# Altium PCB 单相本地卡表_SX-MC6017A-200606.PcbDoc (part 2 of 2)
Units mm, origin at the board's own origin, x right, y up, seen from the top; angles counter-clockwise.
Board outline 98.55 x 94.74 mm, 2 copper layers (Top Layer, Bottom Layer); 169 components, 155 nets, 535 pads, 382 vias.
Unrouted connection lines stored in the file: 1.
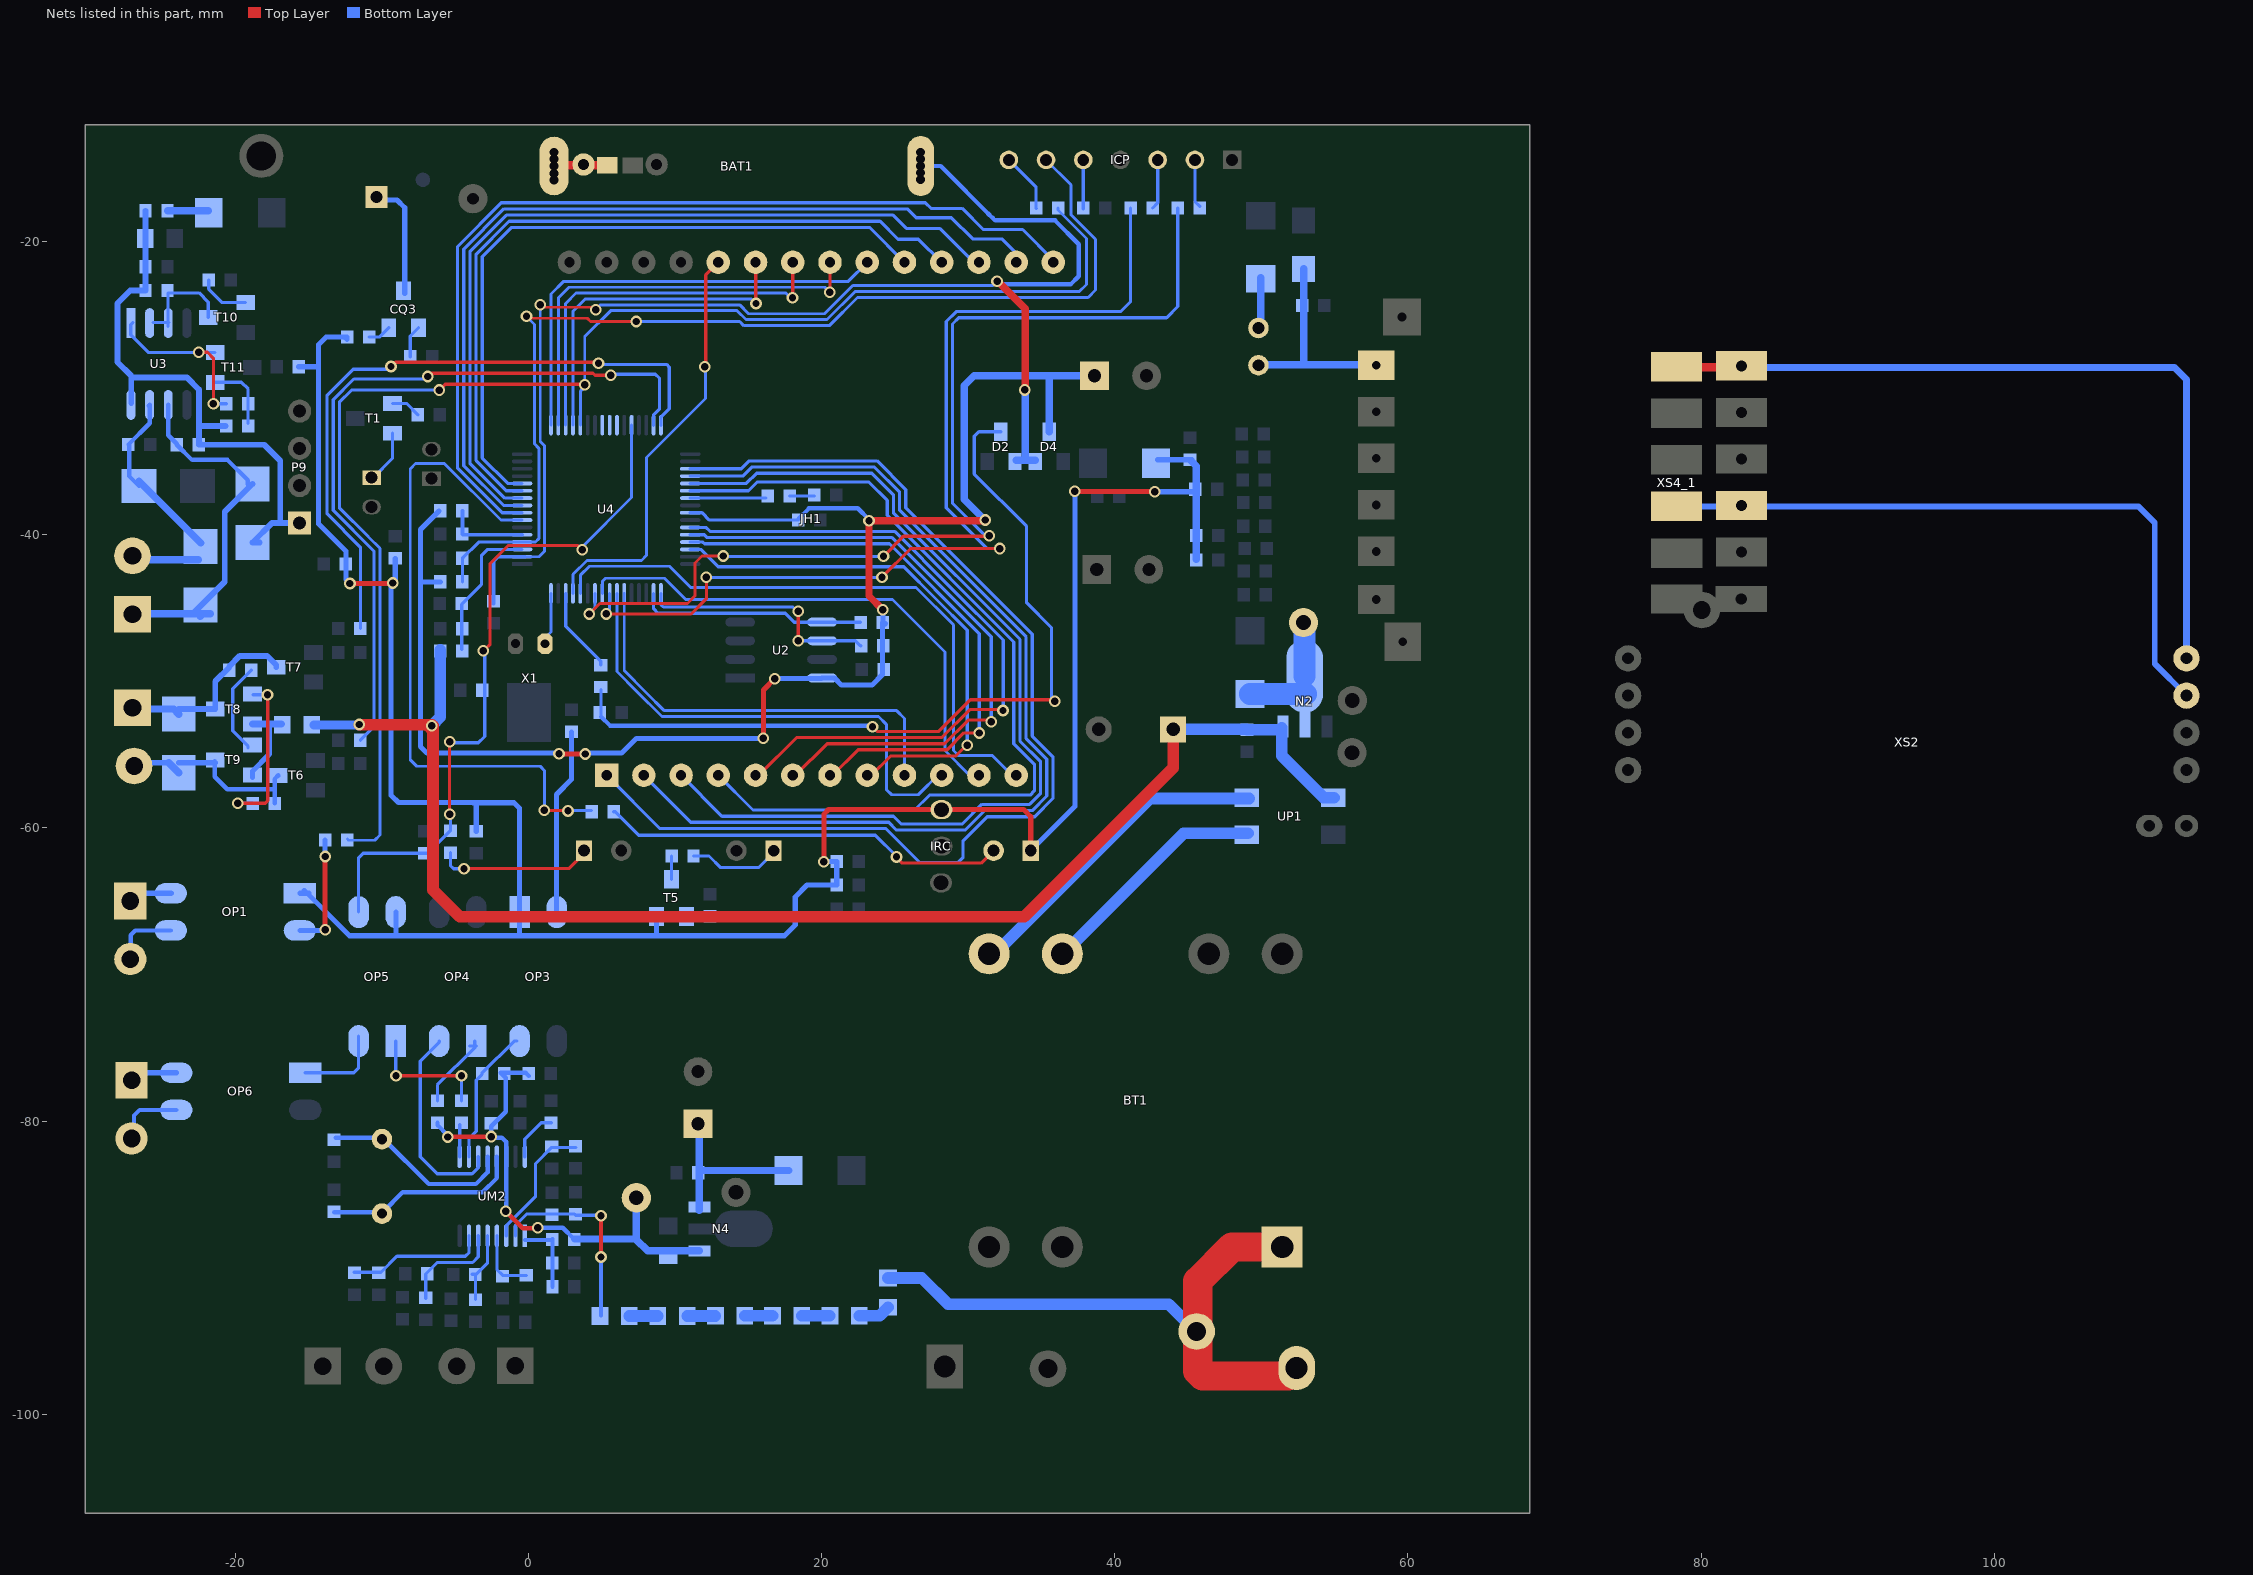
[diagram p2: the nets of this part, all layers, seen from the top]

## Via types
v1: diameter 0.8, hole 0.5, Top Layer to Bottom Layer, 380 vias
v2: diameter 0.8, hole 0.5, Top Layer to Bottom Layer, tented both sides, 2 vias

## Nets (pads, with @x,y where several pads share a name; then routed paths per layer and width w, separated by ;. In a path a pad name is that pad's centre, name@x,y a point inside that pad or via, vN(x,y) a via of type N, cw(c..) or ccw(c..) an arc to the next point about the centre after c; other vN are vias at no path point) (continued)
LVDIN: C13.1 R31.1 R32.2 U4.3 | length 9.9
  Bottom Layer w0.22: R31.1@-4.566,-47.814 -4.566,-44.747 -3.216,-43.398 -3.216,-41.428 -2.784,-40.996 U4.3@-0.445,-40.996
MISO: U4.25
MOSI: U4.24
N: BT1.1 JR10.2 MOV.1 N.1 | length 42.1
  Top Layer w2: BT1.1@51.419,-88.592 47.993,-88.592 45.654,-90.932 45.654,-97.054 46,-97.399 51.85,-97.399 N.1@52.072,-97.177
  Bottom Layer w0.8: JR10.2@24.523,-90.708 26.833,-90.708 28.621,-92.496 43.685,-92.496 45.598,-94.409 MOV.1@45.598,-94.429
Net485A_1: RA.1 REAY1.2@-27.023,-45.429 TVS1.2 TVS3.1 U3.6 | length 24.3
  Bottom Layer w0.3: U3.6@-24.584,-31.138 -24.584,-33.207 RA.1@-23.998,-33.793 ; RA.1@-23.998,-33.854 -22.96,-34.892 -20.541,-34.892 -19.167,-36.266 TVS3.1@-19.167,-36.544
  Bottom Layer w0.4: TVS1.2@-22.908,-45.378 -20.732,-43.203 -20.732,-38.422 TVS3.1@-18.833,-36.523
  Bottom Layer w0.5: REAY1.2@-26.221,-45.378 TVS1.2@-21.717,-45.378 ; TVS1.2@-22.395,-45.556 TVS1.2@-22.217,-45.378
Net485B_1: RB.2 REAY1.1@-27.023,-41.435 TVS1.1 TVS4.2 U3.7 | length 16.4
  Bottom Layer w0.3: RB.2@-27.299,-33.84 -25.854,-32.395 U3.7@-25.854,-31.138 U3.7@-25.908,-31.192 ; RB.2@-27.257,-33.84 -27.257,-35.989 TVS4.2@-26.579,-36.667
  Bottom Layer w0.5: TVS4.2@-26.579,-36.329 TVS4.2@-26.441,-36.467 ; TVS4.2@-26.41,-36.498 TVS4.2@-26.441,-36.467 ; REAY1.1@-26.393,-41.694 TVS1.1@-22.533,-41.694 ; TVS1.1@-22.366,-40.564 -26.441,-36.489 TVS4.2@-26.441,-36.467
NetBAT1_2: BAT1.2 KB.1 pad.1@3.752,-14.734 | length 3.6
  Top Layer w0.6: BAT1.2@1.781,-14.793 KB.1@5.361,-14.793
NetBT1_4: BT1.4 UP1.2 | length 22.3
  Bottom Layer w0.8: BT1.4@31.304,-68.756 31.638,-68.756 42.405,-57.99 UP1.2@49.175,-57.99
NetBT1_5: BT1.5 UP1.1 | length 16.2
  Bottom Layer w0.8: BT1.5@36.304,-68.756 44.691,-60.369 UP1.1@49.08,-60.369
NetC10_2: C10.2 R18.2 | length 1.7
  Bottom Layer w0.22: R18.2@17.82,-37.354 C10.2@19.497,-37.354
NetCQ3_B: CQ3.B R25.2 | length 2.2
  Bottom Layer w0.22: R25.2@-8.069,-27.854 -8.069,-26.437 CQ3.B@-7.511,-25.879
NetCQ3_E: CQ3.E R26.1 | length 1.6
  Bottom Layer w0.22: R26.1@-10.879,-26.497 -10.161,-26.497 CQ3.E@-9.543,-25.879
NetD1_K: D1.K DC3.1 DC4.1 N4.3 | length 12
  Bottom Layer w0.5: N4.3@11.634,-86.105 DC4.1@11.634,-80.156 ; DC3.1@11.691,-83.373 D1.K@17.741,-83.373
NetD6_K: D6.K F1.2 | length 3.9
  Bottom Layer w0.5: F1.2@49.959,-26.304 D6.K@49.959,-22.448
NetD8_A: D8.A N2.2 pad.0@52.871,-45.986 | length 7.5
  Bottom Layer w1.5: D8.A@49.221,-50.851 N2.2@53.044,-50.851 ; pad.0@52.871,-45.986 52.949,-46.063 N2.2@52.949,-49.648
NetD12_K: D12.K R63.2 | length 2.8
  Bottom Layer w0.5: R63.2@-24.636,-17.894 D12.K@-21.857,-17.894
NetDR8_2: DR8.2 T8.B | length 11.3
  Top Layer w0.22: v1@-19.812,-58.322 -17.965,-58.322 -17.788,-58.145 v1@-17.788,-50.945
  Bottom Layer w0.22: v1(-19.84,-58.322) -18.837,-58.322 DR8.2@-18.83,-58.329 ; T8.B@-18.793,-50.915 v1(-17.808,-50.915)
NetDR9_2: DR9.2 T9.B | length 6.2
  Bottom Layer w0.22: T9.B@-19.146,-54.533 -19.146,-54.402 -20.181,-53.368 -20.181,-50.502 DR9.2@-18.925,-49.246
NetICP_5: ICP.5 RJ6.1 | length 3.3
  Bottom Layer w0.22: RJ6.1@37.847,-17.751 ICP.5@37.847,-14.419
NetICP_7: ICP.7 RJ5.1 | length 4.1
  Bottom Layer w0.22: ICP.7@32.767,-14.419 34.63,-16.282 RJ5.1@34.63,-17.704 ; RJ5.1@34.63,-17.737 RJ5.1@34.638,-17.737
NetJ1_A: 
NetJ1_K: BG1.1 T1.E | length 3.7
  Bottom Layer w0.22: BG1.1@-10.712,-36.101 -10.596,-36.101 -9.286,-34.791 T1.E@-9.286,-33.071
NetJC10_2: JC10.2 JC11.2 UM2.7 | length 9.5
  Bottom Layer w0.22: JC10.2@-11.901,-90.319 -10.069,-90.319 -8.98,-89.23 -4.315,-89.23 -4.066,-88.981 UM2.7@-4.066,-87.829
NetJC12_2: JC12.2 JC13.1 JR20.1 UM2.1 | length 5.2
  Bottom Layer w0.22: JR20.1@1.534,-88.119 JR20.1@1.624,-88.21
  Bottom Layer w0.25: UM2.1@-0.247,-88.119 JR20.1@1.534,-88.119 ; JC13.1@1.632,-89.654 JR20.1@1.632,-88.049
  Bottom Layer w0.3: JC12.2@1.632,-91.309 JC13.1@1.632,-89.654
NetJC15_2: JC15.2 UM2.13 X2.2 | length 13.5
  Bottom Layer w0.3: JC15.2@-13.249,-86.219 -9.952,-86.219 -8.58,-84.847 -3.128,-84.847 -2.161,-83.88 UM2.13@-2.161,-82.429
NetJC16_1: JC16.1 UM2.12 X2.1 | length 13.1
  Bottom Layer w0.3: JC16.1@-13.149,-81.139 X2.1@-9.952,-81.139 ; X2.1@-10.086,-81.272 -9.839,-81.272 -6.815,-84.296 -3.593,-84.296 -2.796,-83.499 UM2.12@-2.796,-82.429
NetJR10_1: JR10.1 JR11.2 | length 2.2
  Bottom Layer w0.8: JR11.2@22.56,-93.279 23.952,-93.279 JR10.1@24.523,-92.708
NetJR11_1: JR11.1 JR12.2 | length 1.9
  Bottom Layer w0.8: JR12.2@18.647,-93.286 JR11.1@20.553,-93.286
NetJR12_1: JR12.1 JR13.2 | length 1.9
  Bottom Layer w0.8: JR13.2@14.748,-93.286 JR12.1@16.647,-93.286
NetJR13_1: JR13.1 JR14.1 | length 1.9
  Bottom Layer w0.8: JR14.1@10.823,-93.3 JR13.1@12.734,-93.3
NetJR14_2: JR14.2 JR15.2 | length 1.9
  Bottom Layer w0.8: JR15.2@6.873,-93.3 JR14.2@8.823,-93.3
NetJR21_1: JR21.1 OP3.4 UM2.10 | length 9.4
  Bottom Layer w0.22: UM2.10@-4.066,-82.429 -4.066,-81.202 -3.571,-80.707 -3.571,-77.219 -3.183,-76.831 -3.183,-76.745 -0.978,-74.54 OP3.4@-0.796,-74.54
NetJR22_1: JR22.1 OP4.1 | length 5.6
  Bottom Layer w0.22: JR22.1@-6.216,-78.609 -6.216,-77.536 -3.678,-74.997 OP4.1@-3.678,-74.54 ; OP4.1@-4.03,-74.882 OP4.1@-3.551,-74.882
NetJR23_2: JR23.2 OP3.2 | length 12.7
  Bottom Layer w0.35: OP3.2@1.925,-65.74 1.904,-65.719 1.904,-57.713 2.933,-56.684 JR23.2@2.933,-53.443
NetJR24_2: JR24.2 LM1.A | length 10.7
  Top Layer w0.22: v1@-4.414,-62.776 2.754,-62.776 3.785,-61.745 LM1.A@3.785,-61.545
  Bottom Layer w0.22: JR24.2@-5.332,-61.699 -5.332,-62.561 -5.107,-62.787 v1(-4.406,-62.787)
NetJR26_1: JR26.1 OP5.1 | length 8.6
  Top Layer w0.22: v1(-9.05,-76.912) v1(-4.57,-76.912)
  Bottom Layer w0.22: OP5.1@-9.057,-74.54 -9.057,-76.905 v1(-9.05,-76.912) ; JR26.1@-4.57,-78.609 v1(-4.57,-76.912)
NetJR26_2: JR26.2 UM2.9 | length 2.2
  Bottom Layer w0.22: UM2.9@-4.701,-82.429 JR26.2@-4.701,-80.24
NetLED_IR_A: LED_IR.A R12.2 | length 6.4
  Bottom Layer w0.2: R12.2@11.254,-61.906 12.306,-61.906 13.113,-62.713 15.685,-62.713 16.722,-61.677 LED_IR.A@16.722,-61.549
NetLR1_K: LR1.K R49.2 | length 27.8
  Top Layer w0.22: v1(25.108,-61.976) 25.108,-62.01 25.495,-62.396 30.876,-62.396 LR1.K@31.727,-61.545
  Bottom Layer w0.22: R49.2@5.8,-58.898 5.91,-58.898 7.51,-60.498 23.658,-60.498 25.068,-61.908 v1@25.23,-61.908
NetOP1_2: OP1.2 R42.2 | length 7.9
  Top Layer w0.35: v1(-13.881,-66.954) v1(-13.881,-61.947)
  Bottom Layer w0.35: OP1.2@-15.606,-66.997 -13.925,-66.997 v1(-13.881,-66.954) ; v1(-13.881,-61.947) R42.2@-13.881,-60.825
NetOP4_2: OP4.2 UM2.11 | length 13.8
  Bottom Layer w0.22: OP4.2@-6.091,-74.538 -6.091,-74.613 -7.39,-75.912 -7.39,-82.446 -6.234,-83.602 -3.852,-83.602 -3.431,-83.181 UM2.11@-3.431,-82.429
NetOP5_2: OP5.2 OP6.1 | length 5.9
  Bottom Layer w0.22: OP6.1@-15.239,-76.702 -11.924,-76.702 -11.597,-76.375 OP5.2@-11.597,-74.215
NetR1_2: R1.2 U4.62 | length 6.2
  Bottom Layer w0.22: U4.62@2.53,-43.996 2.53,-46.234 3.016,-46.719 ; 2.817,-46.521 3.016,-46.719 ; R1.2@4.925,-48.885 4.925,-48.629 3.016,-46.719
NetR12_1: R12.1 T5.C | length 1.6
  Bottom Layer w0.2: T5.C@9.754,-63.504 R12.1@9.754,-61.906
NetR18_1: R18.1 U4.39 | length 5.1
  Bottom Layer w0.22: U4.39@11.03,-37.496 R18.1@16.179,-37.496
NetR21_2: R21.2 T1.B | length 2.1
  Bottom Layer w0.22: T1.B@-9.286,-31.039 -8.318,-31.039 R21.2@-7.551,-31.806
NetR30_2: 
NetR47_2: R47.2 T5.B | length 1.6
  Bottom Layer w0.2: T5.B@10.786,-66.028 R47.2@12.383,-66.028
NetR59_2: R59.2 T10.B | length 3.5
  Bottom Layer w0.22: R59.2@-21.82,-22.613 -21.82,-23.232 -20.898,-24.155 T10.B@-19.307,-24.155
NetR60_1: R60.1 T10.C U3.2 U3.3 | length 7.4
  Bottom Layer w0.22: U3.2@-25.617,-25.514 U3.3@-24.534,-25.514 ; U3.3@-24.602,-25.768 -24.602,-23.497 -22.48,-23.497 -21.847,-24.13 T10.C@-21.847,-25.171
NetR61_1: R61.1 R66.1 T11.B | length 4.8
  Bottom Layer w0.22: T11.B@-21.387,-29.597 -19.59,-29.597 -19.138,-30.049 R66.1@-19.138,-32.385
NetR61_2: R61.2 T11.E U3.1 | length 12.3
  Top Layer w0.22: v1(-22.511,-27.54) -21.908,-27.54 -21.504,-27.944 v1(-21.504,-31.055)
  Bottom Layer w0.22: U3.1@-27.002,-25.523 -27.143,-25.664 -27.143,-26.347 -25.926,-27.565 T11.E@-21.387,-27.565 ; v1@-21.523,-31.064 R61.2@-20.629,-31.064
NetRJ1_1: RJ1.1 U4.58 | length 70.8
  Top Layer w0.2: v1(4.142,-45.404) 4.862,-44.685 10.843,-44.685 11.365,-44.163 11.365,-41.923 11.839,-41.449 v1(13.288,-41.449)
  Top Layer w0.22: v1(24.221,-41.463) 25.578,-40.106 v1@31.51,-40.106
  Bottom Layer w0.22: v1@4.153,-45.402 4.53,-45.025 U4.58@4.53,-43.996 ; v1@13.298,-41.489 v1@24.205,-41.489 ; v1@31.51,-40.106 31.188,-40.106 28.925,-37.842 28.925,-25.619 29.354,-25.19 43.531,-25.19 44.297,-24.423 RJ1.1@44.297,-17.704
  other v1: 31.431,-40.074
NetRJ3_1: RJ3.1 U4.56 | length 68.2
  Top Layer w0.2: v1(5.299,-45.396) 11.096,-45.396 12.128,-44.365 v1(12.128,-42.888)
  Top Layer w0.22: v1(24.11,-42.89) 26.058,-40.942 v1(32.142,-40.942)
  Bottom Layer w0.22: v1@5.28,-45.378 5.53,-45.128 U4.56@5.53,-43.996 ; v1@12.113,-42.919 v1@24.205,-42.919 ; v1(32.142,-40.942) 31.295,-40.942 28.505,-38.152 28.505,-25.445 29.18,-24.77 40.389,-24.77 41.075,-24.084 RJ3.1@41.075,-17.704
NetU1_64: U4.64 X1.2 | length 3.6
  Bottom Layer w0.22: X1.2@1.125,-47.43 1.125,-47.036 1.53,-46.631 U4.64@1.53,-43.996
OC: FLQ.2@-27.088,-77.222 OP6.4 | length 2.7
  Bottom Layer w0.4: FLQ.2@-26.696,-76.702 OP6.4@-24.039,-76.702
OE: FLQ.1@-27.088,-81.191 OP6.3 | length 7.9
  Bottom Layer w0.3: FLQ.1@-26.919,-81.089 -26.919,-79.622 -26.539,-79.242 OP6.3@-24.039,-79.242 ; -26.012,-79.242 OP6.3@-24.039,-79.242 ; -25.504,-79.242 OP6.3@-24.039,-79.242
PULSE: C3.1 JR24.1 JR25.2 OP5.3 U4.28 | length 48.4
  Top Layer w0.2: -2.629,-42.59 -2.629,-41.975 -1.395,-40.741 3.384,-40.741 v1(3.669,-41.026)
  Top Layer w0.22: v1(-5.386,-59.074) v1(-5.386,-54.123) ; v1(-3.088,-47.92) v1@-2.991,-47.823 ; v1@-2.991,-47.952 v1@-2.991,-47.823 ; -2.629,-42.59 -2.629,-47.461 v1@-2.991,-47.823
  Bottom Layer w0.2: v1@3.614,-40.971 3.614,-40.877 7.03,-37.461 U4.28@7.03,-32.521
  Bottom Layer w0.22: OP5.3@-11.597,-65.74 -11.597,-62.033 -11.293,-61.729 JR25.2@-7.11,-61.729 ; JR25.2@-7.005,-61.751 -7.116,-61.751 JR25.2@-7.093,-61.729 -6.861,-61.729 JR24.1@-5.332,-60.199 v1@-5.332,-59.129 ; v1(-5.386,-54.123) -5.386,-54.193 -3.423,-54.193 -2.991,-53.761 v1@-2.991,-47.928
QA_T7C: DR9.1 REAY1.2@-27.023,-51.8 T7.C T8.C TVS2.2 | length 13
  Bottom Layer w0.4: REAY1.2@-27.06,-51.887 REAY1.2@-26.911,-51.887 ; TVS2.2@-23.87,-51.887 T8.C@-21.377,-51.887 -21.377,-50.001 -20.425,-49.049 -20.425,-48.987 -19.698,-48.26 -17.845,-48.26 -17.215,-48.89 T7.C@-17.215,-49.034
  Bottom Layer w0.5: REAY1.2@-26.911,-51.887 -24.215,-51.887 TVS2.2@-23.87,-52.232
QB_T6C: DR8.1 REAY1.1@-26.917,-55.777 T6.C T9.C TVS2.1 | length 13.6
  Bottom Layer w0.3: T9.C@-21.414,-55.455 -21.414,-55.549 -21.414,-56.509 -20.566,-57.356 -17.33,-57.356 ; DR8.1@-17.33,-58.329 -17.33,-57.356 ; T6.C@-17.076,-56.453 T6.C@-17.076,-56.411 -17.33,-56.665 -17.33,-57.356
  Bottom Layer w0.4: REAY1.1@-27.114,-55.549 TVS2.1@-24.553,-55.549 ; TVS2.1@-23.87,-55.549 -21.414,-55.549 T9.C@-21.377,-55.549
  Bottom Layer w0.5: TVS2.1@-24.553,-55.549 TVS2.1@-23.87,-56.232
RESET: C14.1 R44.1 U4.5 | length 5.7
  Bottom Layer w0.254: R44.1@-4.512,-38.361 C14.1@-4.512,-39.952 -4.468,-39.996 U4.5@-0.445,-39.996
RLYLED: R49.1 U4.7 | length 44.6
  Top Layer w0.2: v1@1.094,-58.81 v1@2.693,-58.81
  Bottom Layer w0.2: U4.7@-0.445,-38.996 -1.884,-38.996 -5.748,-35.133 -7.706,-35.133 -8.075,-35.502 -8.075,-55.349 -7.631,-55.793 0.794,-55.793 1.074,-56.072 v1(1.074,-58.797) ; v1@2.693,-58.819 R49.1@4.3,-58.819
  other v1: 2.693,-58.838
RLYOFF: DR6.2 U4.31 | length 51.2
  Top Layer w0.22: v1(-6.873,-29.204) -6.643,-28.974 4.391,-28.974 4.531,-29.114 v1(5.611,-29.114)
  Bottom Layer w0.22: DR6.2@-11.473,-54.021 -10.551,-53.1 -10.551,-41.106 -13.324,-38.333 -13.324,-30.78 -11.915,-29.37 v1@-6.877,-29.37 ; v1@5.611,-29.047 8.655,-29.047 8.942,-29.334 8.942,-31.399 8.53,-31.811 U4.31@8.53,-32.521
RLYON: DR7.1 U4.32 | length 45.3
  Top Layer w0.22: v1(-9.382,-28.52) -9.084,-28.222 v1@4.62,-28.222
  Bottom Layer w0.22: DR7.1@-11.473,-46.401 -11.473,-40.846 -13.744,-38.574 -13.744,-30.479 -11.976,-28.711 v1@-9.382,-28.711 ; v1@4.64,-28.376 9.414,-28.376 9.605,-28.567 9.605,-31.394 9.03,-31.969 U4.32@9.03,-32.521
  other v1: 4.774,-28.297
RST_0: pad.3 XS2.8 XS4_1.2 | length 45.9
  Top Layer w0.4: pad.3@83.92,-38.058 ccw(c83.92,-37.863) pad.3@84.058,-38.001
  Bottom Layer w0.4: XS4_1.2@78.323,-38.058 109.83,-38.058 110.948,-39.176 110.948,-48.798 XS2.8@113.118,-50.968
RX0: 
RX_485: 
S0: JH1.26 U4.35 | length 76.4
  Bottom Layer w0.22: JH1.26@5.408,-56.414 JH1.26@5.327,-56.414 8.952,-60.038 24.38,-60.038 26.707,-62.366 29.284,-62.366 29.647,-62.003 29.647,-60.871 31.282,-59.237 34.533,-59.237 35.776,-57.994 35.776,-55.138 34.368,-53.73 34.368,-46.79 25.733,-38.155 25.733,-36.913 23.777,-34.958 15.056,-34.958 14.519,-35.496 U4.35@11.03,-35.496
S1: JH1.25 U4.36 | length 70.1
  Bottom Layer w0.22: JH1.25@7.867,-56.414 11.072,-59.618 24.571,-59.618 25.102,-60.149 29.775,-60.149 31.108,-58.817 34.359,-58.817 35.356,-57.82 35.356,-55.312 33.948,-53.904 33.948,-46.964 25.313,-38.329 25.313,-37.087 23.603,-35.378 15.23,-35.378 14.613,-35.996 U4.36@11.03,-35.996
S2: JH1.24 U4.37 | length 66.1
  Bottom Layer w0.22: JH1.24@10.407,-56.414 13.192,-59.198 24.901,-59.198 25.432,-59.729 29.601,-59.729 30.934,-58.397 34.185,-58.397 34.936,-57.646 34.936,-55.486 33.528,-54.078 33.528,-47.138 24.893,-38.503 24.893,-37.261 23.429,-35.798 15.564,-35.798 14.867,-36.496 U4.37@11.03,-36.496
S3: JH1.23 U4.38 | length 61.3
  Bottom Layer w0.22: U4.38@11.03,-36.996 15.008,-36.996 15.609,-36.395 23.217,-36.395 24.473,-37.65 24.473,-38.677 33.108,-47.312 33.108,-54.252 34.516,-55.66 34.516,-57.472 34.232,-57.756 27.354,-57.756 26.331,-58.778 15.312,-58.778 JH1.23@12.947,-56.414
S4: JH1.22 U4.43 | length 48.2
  Top Layer w0.22: JH1.22@15.487,-56.414 15.703,-56.414 18.285,-53.832 28.204,-53.832 30.112,-51.925 32.225,-51.925 v1@32.379,-51.77
  Bottom Layer w0.22: U4.43@11.03,-39.496 12.101,-39.496 12.377,-39.772 24.973,-39.772 28.852,-43.651 ; 28.938,-43.737 28.852,-43.651 ; v1@32.379,-51.939 32.379,-47.178 28.852,-43.651
  other v1: 32.366,-51.983
S5: JH1.21 U4.44 | length 44.3
  Top Layer w0.22: JH1.21@18.027,-56.414 18.21,-56.414 20.372,-54.252 28.378,-54.252 29.985,-52.645 v1@31.565,-52.645
  Bottom Layer w0.22: U4.44@11.03,-39.996 11.989,-39.996 12.184,-40.192 24.799,-40.192 31.565,-46.958 v1@31.565,-52.718
  other v1: 31.563,-52.758
S6: JH1.20 U4.45 | length 40.4
  Top Layer w0.22: JH1.20@20.567,-56.414 20.738,-56.414 22.48,-54.672 28.552,-54.672 29.704,-53.52 v1(30.751,-53.52)
  Bottom Layer w0.22: U4.45@11.03,-40.496 11.891,-40.496 12.007,-40.612 24.625,-40.612 30.751,-46.738 v1@30.751,-53.485
S7: JH1.19 U4.46 | length 36.7
  Top Layer w0.22: JH1.19@23.107,-56.414 23.383,-56.414 24.705,-55.092 29.141,-55.092 v1@29.926,-54.307
  Bottom Layer w0.22: U4.46@11.03,-40.996 11.752,-40.996 12.936,-42.18 25.599,-42.18 27.798,-44.379 29.937,-46.518 v1@29.937,-54.362
  other v1: 29.937,-54.354
S8: JH1.18 U4.54 | length 29.6
  Bottom Layer w0.2: U4.54@6.53,-43.996 6.53,-49.266 8.017,-50.753 9.264,-52 25.114,-52 25.647,-52.533 JH1.18@25.647,-56.414
S9: JH1.17 U4.55 | length 34.3
  Bottom Layer w0.2: U4.55@6.03,-43.996 6.03,-49.331 7.367,-50.669 9.098,-52.4 23.881,-52.4 24.411,-52.93 24.411,-57.372 24.775,-57.736 26.584,-57.736 28.007,-56.313 JH1.17@28.087,-56.313 ; JH1.17@28.187,-56.414 JH1.17@28.187,-56.212
S10: JH1.16 U4.57 | length 36.1
  Bottom Layer w0.2: U4.57@5.03,-43.996 5.03,-43.186 5.251,-42.965 9.274,-42.965 10.724,-44.415 12.269,-44.415 24.826,-44.415 28.416,-48.005 28.416,-54.722 30.108,-56.414 JH1.16@30.727,-56.414
S11: JH1.15 U4.60 | length 42.4
  Bottom Layer w0.2: U4.60@3.53,-43.996 3.53,-42.766 4.151,-42.145 9.614,-42.145 11.064,-43.595 12.57,-43.595 ; 12.371,-43.595 12.57,-43.595 ; JH1.15@33.267,-56.414 33.242,-56.388 32.968,-56.388 31.636,-55.056 29.316,-55.056 28.984,-54.724 28.984,-46.144 26.435,-43.595 12.57,-43.595
S12: JH1.14 U4.8 | length 64.4
  Bottom Layer w0.22: U4.8@-0.445,-38.496 -1.805,-38.496 -4.841,-35.46 -4.841,-20.33 -1.857,-17.347 27.073,-17.347 27.456,-17.73 29.58,-17.73 31.022,-19.171 33.705,-19.171 35.806,-21.272 JH1.14@35.806,-21.412
S13: JH1.13 U4.9 | length 60.6
  Bottom Layer w0.22: U4.9@-0.445,-37.996 -1.711,-37.996 -4.421,-35.286 -4.421,-20.504 -1.683,-17.767 25.845,-17.767 26.439,-18.361 28.847,-18.361 30.297,-19.81 32.286,-19.81 33.266,-20.791 JH1.13@33.266,-21.412
S14: JH1.12 U4.10 | length 56.1
  Bottom Layer w0.22: U4.10@-0.445,-37.496 -1.617,-37.496 -4.001,-35.112 -4.001,-20.678 -1.509,-18.187 24.873,-18.187 25.78,-19.094 28.044,-19.094 30.362,-21.412 JH1.12@30.726,-21.412
S15: JH1.11 U4.11 | length 52.7
  Bottom Layer w0.22: -3.581,-30.699 -3.581,-29.931 ; U4.11@-0.445,-36.996 -1.523,-36.996 -3.581,-34.938 -3.581,-29.931 ; JH1.11@28.186,-21.412 26.601,-19.827 25.206,-19.827 23.986,-18.607 -1.335,-18.607 -3.581,-20.852 -3.581,-29.931
S16: JH1.10 U4.12 | length 49.1
  Bottom Layer w0.22: -3.161,-30.58 -3.161,-29.282 ; U4.12@-0.445,-36.496 -1.429,-36.496 -3.161,-34.764 -3.161,-29.282 ; JH1.10@25.646,-21.412 23.261,-19.027 -1.161,-19.027 -3.161,-21.026 -3.161,-29.282
S17: JH1.9 U4.17 | length 31.4
  Bottom Layer w0.2: U4.17@1.538,-32.513 U4.17@1.53,-32.521 1.53,-23.576 2.398,-22.708 21.811,-22.708 JH1.9@23.106,-21.412
S18: JH1.8 U4.18 | length 29.8
  Top Layer w0.22: v1@20.561,-23.446 20.561,-21.417 JH1.8@20.566,-21.412
  Bottom Layer w0.2: U4.18@2.03,-32.521 2.03,-23.842 2.764,-23.108 20.208,-23.108 v1(20.546,-23.446)
  Bottom Layer w0.22: v1@20.464,-23.527 v1@20.561,-23.624
S19: JH1.7 U4.19 | length 26.6
  Top Layer w0.22: v1@18.022,-23.825 18.022,-21.417 JH1.7@18.026,-21.412
  Bottom Layer w0.2: U4.19@2.53,-32.521 2.53,-24.218 3.24,-23.508 17.553,-23.508 17.874,-23.829 v1(18.004,-23.829)
S20: JH1.6 U4.20 | length 23.6
  Top Layer w0.22: JH1.6@15.486,-21.412 15.507,-21.433 v1@15.507,-24.22
  Bottom Layer w0.2: U4.20@3.03,-32.521 3.03,-24.744 3.866,-23.908 15.202,-23.908 v1(15.513,-24.22)
S21: JH1.5 U4.61 | length 28.9
  Top Layer w0.22: v1@12.092,-28.628 12.092,-22.267 JH1.5@12.946,-21.412
  Bottom Layer w0.2: U4.61@3.03,-43.996 3.03,-42.696 3.981,-41.745 7.7,-41.745 8.044,-41.401 8.044,-34.717 12.068,-30.693 v1@12.068,-28.581
  other v1: 12.028,-28.533
S+: FLQ.2@-27.173,-64.982 OP1.4 | length 2
  Bottom Layer w0.4: FLQ.2@-26.366,-64.457 OP1.4@-24.406,-64.457
S-: FLQ.1@-27.173,-68.951 OP1.3 | length 4.8
  Bottom Layer w0.3: FLQ.1@-27.145,-69.205 -27.145,-67.312 -26.83,-66.997 OP1.3@-24.406,-66.997
SCL: R11.2 U2.6 U4.49 | length 18.3
  Top Layer w0.22: v1(18.401,-47.224) v1(18.401,-45.211)
  Bottom Layer w0.22: U4.49@9.03,-43.996 9.03,-44.759 9.197,-44.926 12.811,-44.926 ; 11.307,-44.926 12.811,-44.926 ; v1(18.401,-47.224) 18.408,-47.231 U2.6@20.025,-47.231 22.3,-47.231 22.641,-47.572 R11.2@22.69,-47.572 ; v1@18.412,-45.165 18.257,-45.165 18.017,-44.926 12.811,-44.926
SCLK: U4.26
SDA: R13.2 U2.5 U4.50 | length 15.5
  Bottom Layer w0.22: U4.50@8.53,-43.996 8.53,-45.055 8.822,-45.346 17.506,-45.346 18.121,-45.961 U2.5@20.025,-45.961 R13.2@22.634,-45.961
SEC: R42.1 RJ5.2 U4.21 | length 98.7
  Top Layer w0.22: v1(-6.095,-30.128) -5.694,-29.726 v1@3.82,-29.726
  Bottom Layer w0.2: R42.1@-12.352,-60.759 -12.273,-60.839 -10.498,-60.839 -10.141,-60.482 -10.141,-40.922 -10.921,-40.142 ; U4.21@3.53,-32.521 3.53,-30.208 3.833,-29.906 v1@3.833,-29.811 ; v1@3.846,-29.798 v1@3.833,-29.811 ; RJ5.2@36.13,-17.704 36.13,-17.849 38.058,-19.776 38.058,-22.915 37.572,-23.4 22.284,-23.4 20.364,-25.32 14.84,-25.32 14.228,-24.708 5.6,-24.708 3.833,-26.475 v1(3.833,-29.756) v1@3.833,-29.811
  Bottom Layer w0.22: -10.921,-40.142 -12.904,-38.159 -12.904,-30.954 -12.079,-30.128 v1(-6.095,-30.128)
SPK1: CQ3.C SPK.1 | length 8.3
  Bottom Layer w0.35: SPK.1@-10.647,-17.152 -8.975,-17.152 -8.449,-17.678 CQ3.C@-8.449,-23.532
SWCLK: ICP.2 RJ1.2 | length 3.3
  Bottom Layer w0.22: ICP.2@45.467,-14.419 45.467,-17.267 RJ1.2@45.79,-17.589
SWIO: ICP.3 RJ3.2 | length 3.4
  Bottom Layer w0.22: RJ3.2@42.575,-17.704 42.927,-17.352 ICP.3@42.927,-14.419
TEST: C5.1 ICP.6 R36.1 U4.4 | length 73.9
  Top Layer w0.2: v1@-0.136,-25.224 3.998,-25.224 4.22,-25.447 v1(7.347,-25.447)
  Bottom Layer w0.2: U4.4@-0.445,-40.496 0.465,-40.496 0.699,-40.262 0.699,-34.097 0.396,-33.794 0.396,-25.655 v1@-0.175,-25.084 ; v1(7.347,-25.447) 14.402,-25.447 14.684,-25.73 20.52,-25.73 22.437,-23.813 38.183,-23.813 38.689,-23.307 38.689,-19.842 37.01,-18.163 37.01,-16.122 ICP.6@35.307,-14.419
  Bottom Layer w0.22: R36.1@-4.512,-43.209 C5.1@-4.512,-41.603 ; C5.1@-4.495,-41.603 C5.1@-4.512,-41.603 ; -4.036,-41.127 C5.1@-4.512,-41.603 ; U4.4@-0.445,-40.496 -3.405,-40.496 C5.1@-4.512,-41.603
  other v1: -0.136,-25.084
TX0: 
TX_485: 
V1N: JC4.2 JR8.2 UM2.6 | length 7.2
  Bottom Layer w0.22: JR8.2@-7.02,-92.083 -7.02,-90.433 -6.236,-89.65 -3.819,-89.65 -3.431,-89.262 UM2.6@-3.431,-87.829
V1P: JC3.1 JR7.2 UM2.5 | length 4.9
  Bottom Layer w0.22: JC3.1@-3.842,-90.456 -3.58,-90.456 -2.796,-89.672 UM2.5@-2.796,-87.829 ; JR7.2@-3.627,-92.182 JC3.1@-3.627,-90.505
V2P: JC1.1 JR2.1 UM2.4 | length 6.1
  Bottom Layer w0.22: -2.161,-89.438 UM2.4@-2.161,-87.829 -2.161,-90.126 -1.754,-90.532 JC1.1@-0.161,-90.532
V3N: JC5.2 JR17.2 UM2.3 | length 9
  Bottom Layer w0.22: UM2.3@-1.526,-87.829 -1.526,-87.137 0.478,-85.133 0.478,-82.896 1.579,-81.795 JR17.2@3.232,-81.795
V3P: JC6.1 JR15.1 JR16.1 UM2.2 | length 13.8
  Top Layer w0.254: v1(4.944,-89.272) v1(4.944,-86.465)
  Bottom Layer w0.22: UM2.2@-0.891,-87.829 -0.891,-87.096 -0.134,-86.34 3.137,-86.34 JR16.1@3.232,-86.434
  Bottom Layer w0.254: JR16.1@3.232,-86.434 4.913,-86.434 v1(4.944,-86.465) ; v1(4.944,-89.272) 4.945,-89.273 JR15.1@4.945,-93.282
V18V: C36.2 EP1.1 N2.3 R31.2 R38.1 UP1.3 | length 97.1
  Top Layer w0.35: -7.013,-53.203 -6.662,-53.554
  Top Layer w0.8: v1@-11.561,-52.955 -6.589,-52.955 -6.516,-53.028 -6.516,-64.242 -4.692,-66.066 33.817,-66.066 43.979,-55.904 EP1.1@43.979,-53.273
  Bottom Layer w0.6: R38.1@-14.64,-52.982 v1@-11.588,-52.982
  Bottom Layer w0.8: v1@-6.534,-52.948 -6.017,-52.43 R31.2@-6.017,-47.863 ; EP1.1@43.979,-53.273 C36.2@49.024,-53.273 ; C36.2@49.024,-53.305 N2.3@51.217,-53.305 ; N2.3@51.388,-53.165 51.388,-55.084 54.243,-57.939 UP1.3@54.947,-57.939
  other v1: -6.6,-53.035 -11.547,-52.948
V485: DC7.2 DC8.1 P9.1 R60.2 R63.1 R66.2 RA.2 TVS3.2 U3.8 | length 39.7
  Bottom Layer w0.4: U3.8@-27.113,-31.001 -27.113,-29.149 -28.058,-28.204 -28.058,-24.213 -27.177,-23.332 R60.2@-26.136,-23.332 R63.1@-26.136,-17.894 ; -27.002,-29.26 -23.319,-29.26 -22.483,-30.096 RA.2@-22.483,-33.838 ; RA.2@-22.498,-33.854 RA.2@-22.405,-33.761 ; -22.389,-32.588 R66.2@-20.677,-32.588 ; RA.2@-22.349,-33.854 -18.03,-33.854 -16.945,-34.939 -16.945,-39.145 ; TVS3.2@-18.34,-40.523 TVS3.2@-18.833,-40.523 -17.494,-39.184 P9.1@-15.62,-39.184
VAA: ?.1@57.834,-28.429 C11.1 D10.2 F1.1 | length 14.3
  Bottom Layer w0.5: F1.1@50.157,-28.408 ?.1@57.911,-28.408 ; 52.879,-28.372 D10.2@52.879,-21.854
VBAT: BAT1.1 C7.1 D2.1 D4.3 U4.2 | length 92.4
  Top Layer w0.2: v1@0.825,-24.472 v1@4.582,-24.472
  Top Layer w0.5: v1@32.018,-22.708 33.878,-24.568 v1@33.878,-30.013
  Bottom Layer w0.2: U4.2@-0.232,-41.496 0.708,-41.496 1.099,-41.104 1.099,-33.932 0.796,-33.628 0.796,-30.417 ; 0.796,-30.511 0.796,-30.417 ; v1@0.796,-24.472 0.796,-30.417 ; v1@4.617,-24.602 4.911,-24.308 14.402,-24.308 15.014,-24.92 20.199,-24.92 22.124,-22.995 31.689,-22.995 v1@31.938,-22.745
  Bottom Layer w0.254: C7.1@-2.398,-44.694 -2.398,-43.49 ; -2.398,-42.66 -2.398,-43.49 ; U4.2@-0.232,-41.496 U4.2@-0.445,-41.496 -2.082,-41.496 -2.398,-41.812 -2.398,-43.49
  Bottom Layer w0.3: BAT1.1@26.754,-14.838 28.122,-14.838 31.661,-18.378 ; 31.337,-18.054 31.661,-18.378 ; v1(31.968,-22.7) 32.183,-22.915 36.983,-22.915 37.546,-22.352 37.546,-20.17 35.925,-18.549 31.832,-18.549 31.661,-18.378
  Bottom Layer w0.5: D2.1@33.268,-34.922 33.896,-34.922 ; v1@33.896,-30.114 33.896,-34.922 ; D4.3@34.577,-34.922 33.896,-34.922
  other v1: 33.846,-30.114 4.585,-24.651 0.796,-24.302
VCC: C15.2 C35.1 D4.2 DC13.1 pad.1@82.758,-28.476 R11.1 R13.1 R36.2 R44.2 U2.8 U4.41 XS2.9 XS4_1.5 | length 167.4
  Top Layer w0.35: v1@2.051,-54.898 v1@2.074,-54.898 ; v1(2.074,-54.946) v1@3.86,-54.946 ; v1(16.02,-53.89) 16.02,-50.587 v1(16.794,-49.813)
  Top Layer w0.5: v1(23.228,-39.039) 23.228,-44.174 v1(24.173,-45.118) ; v1@23.267,-39.039 v1@31.163,-39.039
  Top Layer w0.6: XS4_1.5@78.294,-28.563 pad.1@82.765,-28.563
  Bottom Layer w0.22: U4.41@11.03,-38.496 11.84,-38.496 12.337,-38.993 C15.2@18.401,-38.993
  Bottom Layer w0.3: C15.2@18.426,-38.91 19.133,-38.203 ; 19.119,-38.193 22.451,-38.193 v1@23.221,-38.963
  Bottom Layer w0.35: -7.315,-43.209 R36.2@-6.012,-43.209 ; R44.2@-6.111,-38.379 -7.377,-39.644 -7.377,-54.454 -6.932,-54.898 v1@2.074,-54.898 ; v1(3.86,-54.957) 3.919,-54.899 6.345,-54.899 7.353,-53.89 v1@15.991,-53.89 ; v1(16.794,-49.813) U2.8@19.983,-49.813 ; U2.8@20.025,-49.771 20.865,-49.771 21.353,-50.259 23.425,-50.259 24.156,-49.528 R13.1@24.156,-45.984 ; R13.1@24.173,-45.984 v1(24.173,-45.118) ; R13.1@24.293,-46.121 R13.1@24.359,-46.055
  Bottom Layer w0.5: v1@31.143,-39.004 29.728,-37.589 29.728,-29.817 30.391,-29.154 DC13.1@38.61,-29.154 ; D4.2@35.518,-32.971 35.518,-29.201 ; XS4_1.5@78.323,-28.533 78.38,-28.59 112.301,-28.59 113.118,-29.408 XS2.9@113.118,-48.428
  other v1: 31.163,-38.985
VCD: R38.2 T8.E T9.E | length 6.1
  Bottom Layer w0.35: T9.E@-18.837,-56.565 -18.837,-56.127 -17.669,-54.959 -17.669,-52.959
  Bottom Layer w0.5: T8.E@-18.837,-52.903 R38.2@-16.855,-52.903
VDD1P8: DC2.1 UM2.16 | length 3.5
  Bottom Layer w0.22: UM2.16@-0.256,-82.429 -0.256,-81.229 0.863,-80.109 DC2.1@1.54,-80.109
VEMU: C2.1 DC5.1 JR20.2 JR21.2 JR22.2 JR27.2 N4.1 pad.0@7.356,-85.234 UM2.14 | length 34.9
  Top Layer w0.3: v1@-5.548,-81.059 v1(-2.538,-81.059) ; v1(-1.555,-86.146) -0.393,-87.308 v1@0.595,-87.308
  Bottom Layer w0.3: JR22.2@-6.216,-80.109 -6.216,-80.275 -5.508,-80.983 v1(-5.508,-81.085) ; v1@-1.526,-86.183 UM2.14@-1.526,-82.429 -1.526,-81.421 -1.822,-81.125 -2.472,-81.125 v1(-2.538,-81.059) -2.538,-80.348 -1.558,-79.368 -1.558,-77.052 -1.897,-76.713 -0.189,-76.713 JR27.2@0.025,-76.927 ; v1(0.618,-87.285) 0.621,-87.282 2.337,-87.282 JR20.2@3.104,-88.049
  Bottom Layer w0.5: JR20.2@3.131,-88.049 7.314,-88.049 7.356,-88.092 ; 7.356,-87.514 7.356,-86.885 ; pad.0@7.356,-85.234 7.356,-86.885 ; N4.1@11.662,-88.859 8.123,-88.859 7.356,-88.092 ; 7.356,-88.092 7.356,-86.885
VEXT: C12.2 C22.1 C24.1 D7.K IRC.3 JR29.2 LR1.A OP1.1 OP3.1 OP5.4 R20.1 R23.1 R24.1 R26.2 R29.1 R40.1 R54.2 T5.E | length 168.6
  Top Layer w0.35: v1(-12.19,-43.327) v1@-9.378,-43.327 ; v1(20.147,-62.308) 20.147,-59.061 20.457,-58.751 IRC.3@28.171,-58.751 33.78,-58.751 34.267,-59.238 LR1.A@34.267,-61.545 ; v1(37.272,-37.035) v1@42.782,-37.035
  Bottom Layer w0.35: R40.1@-15.69,-28.533 -14.378,-28.533 ; OP1.1@-15.606,-64.457 OP1.1@-14.99,-64.457 ; OP1.1@-15.307,-64.259 -12.21,-67.355 -9.057,-67.355 ; v1(-12.19,-43.327) -12.465,-43.052 C22.1@-12.465,-41.992 -12.465,-41.124 -14.339,-39.25 -14.339,-27.027 -13.809,-26.497 R26.2@-12.552,-26.497 ; v1@-9.378,-43.289 -9.378,-57.767 -8.879,-58.266 -3.797,-58.266 ; v1@-9.099,-43.118 R54.2@-9.099,-41.611 ; OP5.4@-9.057,-65.74 -9.057,-67.355 ; -3.786,-58.278 -0.998,-58.278 -0.615,-58.661 -0.615,-67.336 ; JR29.2@-3.57,-60.229 -3.57,-58.493 ; 8.738,-67.281 T5.E@8.738,-66.044 ; v1@20.197,-62.29 C24.1@21.03,-62.29 R23.1@21.031,-63.903 18.999,-63.903 18.192,-64.71 18.192,-66.625 17.462,-67.355 -9.057,-67.355 ; LR1.A@34.267,-61.545 37.27,-58.543 ; 37.272,-58.54 v1(37.272,-37.035) ; v1(42.719,-37.059) R29.1@45.322,-37.059 ; D7.K@42.918,-34.881 C12.2@45.266,-34.881 ; R26.2@-12.552,-26.497 -12.379,-26.671 R26.2@-12.379,-26.497 R26.2@-12.552,-26.497
  Bottom Layer w0.5: C12.2@45.175,-34.935 45.545,-35.305 R20.1@45.545,-41.658
  other v1: -9.27,-43.289
VRTC: C4.1 D2.2 R1.1 | length 55.9
  Top Layer w0.22: 23.777,-53.412 27.985,-53.412 30.149,-51.249 v1@35.886,-51.249
  Bottom Layer w0.22: C4.1@4.942,-52.407 R1.1@4.942,-50.555 ; D2.2@32.227,-32.966 30.726,-32.966 30.408,-33.284 30.408,-35.856 33.981,-39.429 33.981,-44.65 35.677,-46.346 v1@35.677,-51.355
  Bottom Layer w0.3: C4.1@4.942,-52.407 5.554,-53.018 23.383,-53.018 v1(23.466,-53.101)
  other v1: 35.903,-51.355
pads on no net: BT1.6 BT1.7 XS2.1 XS2.3 XS2.6
copper on no net: | length 3.9
  Bottom Layer w0.3: 16.755,-56.897 16.755,-55.605 ; 19.311,-57.078 19.311,-55.785 ; 21.847,-57.03 21.847,-55.738

## Polygon pours and split planes (outlines as drawn)
L on Top Layer "Keep-Out Layer-No Net" (hatched 90Degree grid 0.3 track 0.3, remove dead copper, pour order 1001): -14.256,-74.32 -15.102,-75.166 -15.102,-75.787 -15.102,-93.611 -14.228,-94.485 -14.143,-94.401 3.737,-94.401 3.963,-94.401 4.612,-93.752 4.612,-91.129 4.753,-91.129 6.332,-89.55 6.36,-89.578 14.652,-89.578 14.708,-89.578 15.695,-88.591 15.695,-75.533 15.611,-75.533 14.455,-74.377
GND on Top Layer "Keep-Out Layer-No Net" (hatched 90Degree grid 0.3 track 0.3, remove dead copper, pour order 1000): -16.428,-11.907 -28.047,-11.907 -28.442,-12.302 -28.386,-12.358 -28.386,-34.244 -28.047,-34.582 -27.596,-35.033 -21.617,-35.033 -18.966,-35.033 -18.345,-35.654 -18.289,-35.71 -18.289,-38.756 -18.289,-40.336 -17.612,-41.013 -17.161,-41.464 -14.51,-41.464 -14.51,-12.133 -14.566,-12.076
IC-GND on Top Layer "Keep-Out Layer-No Net" (hatched 90Degree grid 0.3 track 0.3, remove dead copper, pour order 1003): 73.141,-22.971 73.141,-62.121 73.185,-62.166 114.499,-62.166 114.499,-23.104 114.477,-23.082
GND on Top Layer "Keep-Out Layer-No Net" (hatched 90Degree grid 0.3 track 0.3, remove dead copper, pour order 1001): -16.336,-11.985 68.269,-11.985 68.302,-12.018 68.302,-61.072 67.606,-61.767 27.628,-61.767 27.076,-62.319 23.477,-65.919 21.964,-65.919 -13.835,-65.919 -14.906,-64.848 -14.906,-41.392 -16.314,-39.984 -16.424,-39.874 -16.424,-12.14
L on Bottom Layer "Keep-Out Layer-No Net" (hatched 90Degree grid 0.3 track 0.3, remove dead copper, pour order 1003): -14.228,-74.32 -15.13,-75.223 -15.13,-77.366 -15.13,-93.921 -14.453,-94.598 -14.341,-94.485 3.737,-94.485 4.612,-93.611 4.612,-93.47 4.612,-91.355 4.725,-91.242 6.276,-89.691 11.521,-89.691 14.652,-89.691 15.921,-88.422 15.752,-88.252 15.752,-79.199 15.752,-75.561 14.596,-74.405
GND on Bottom Layer "Keep-Out Layer-No Net" (hatched 90Degree grid 0.3 track 0.3, remove dead copper, pour order 1002): -14.566,-12.02 -28.442,-12.02 -28.442,-34.3 -27.652,-35.09 -27.596,-35.146 -19.079,-35.146 -19.079,-35.316 -18.176,-36.218 -18.176,-40.054 -18.176,-40.392 -16.935,-41.633 -16.879,-41.689 -14.679,-41.689 -14.284,-41.295 -14.284,-11.907
IC-GND on Bottom Layer "Keep-Out Layer-No Net" (hatched 90Degree grid 0.3 track 0.3, remove dead copper, pour order 1007): 73.108,-23.002 73.108,-62.13 73.086,-62.153 114.489,-62.153 114.533,-62.108 114.533,-23.024 114.555,-23.002
GND on Bottom Layer "Keep-Out Layer-No Net" (hatched 90Degree grid 0.3 track 0.3, remove dead copper, pour order 1005): -16.38,-12.01 68.28,-12.01 68.302,-11.988 68.302,-61.141 67.86,-61.583 67.639,-61.804 53.198,-61.804 27.495,-61.804 25.287,-64.012 23.388,-65.911 10.228,-65.911 -13.797,-65.911 -14.901,-64.807 -14.901,-41.312 -15.784,-40.429 -16.358,-39.855 -16.358,-12.032

## Keep-outs
Keep-Out Layer:
  circle w0.1: c-24.912,-89.994 r1.984
  circle w0.1: c-15.26,-22.938 r1.984
  circle w0.1: c64.75,-17.858 r1.984
  circle w0.1: c64.75,-89.994 r1.984
  lines w0.1: -28.555,-97.223 ccw(c-26.654,-97.349) -26.527,-99.25 ; -28.551,-97.252 -28.551,-18.597 ; -28.548,-18.617 cw(c-26.647,-18.49) -26.52,-16.589 ; -26.554,-99.256 66.261,-99.282 ; -26.543,-16.588 -21.641,-16.588 ; -21.614,-14.053 cw(c-19.714,-13.926) -19.587,-12.025 ; -21.609,-16.588 -21.609,-14.053 ; -19.587,-12.016 59.465,-12.016 ; 59.329,-12.027 cw(c59.456,-13.928) 61.357,-14.055 ; 59.432,-45.684 59.432,-26.729 ; 61.249,-86.695 61.249,-45.68 ; 61.249,-26.727 61.249,-21.436 ; 61.248,-21.414 66.274,-21.414 ccw(c66.401,-19.514) 68.302,-19.387 ; 61.256,-86.692 66.274,-86.692 cw(c66.401,-88.593) 68.302,-88.72 ; 61.361,-14.582 61.361,-13.859 ; 61.393,-14.582 66.295,-14.582 ; 66.273,-99.285 ccw(c66.399,-97.385) 68.3,-97.258 ; 66.272,-14.583 cw(c66.399,-16.484) 68.3,-16.611 ; 68.306,-97.262 68.306,-16.563 ; 73.105,-60.773 73.105,-24.536 ; 73.106,-24.602 cw(c74.603,-24.509) 74.51,-23.012 ; 73.109,-60.763 ccw(c74.606,-60.67) 74.699,-62.167 ; 74.509,-23.012 80.139,-23.012 ; 74.695,-62.17 80.134,-62.17 ; 79.45,-44.868 82.346,-44.868 82.346,-46.011 81.939,-46.011 ; 79.475,-44.97 79.475,-46.113 80.16,-46.113 80.16,-62.168 ; 80.154,-26.216 79.538,-26.216 79.528,-27.22 82.459,-27.22 82.459,-26.241 ; 80.166,-26.216 80.166,-23.024 ; 81.903,-26.242 81.903,-23.05 ; 81.905,-23.012 112.975,-23.012 ; 81.925,-26.241 82.452,-26.241 ; 81.943,-46.012 81.943,-62.148 81.965,-62.17 113.102,-62.17 ; 112.909,-23.005 cw(c113.002,-24.502) 114.499,-24.409 114.499,-60.564 ; 113.095,-62.167 ccw(c113.002,-60.67) 114.499,-60.577
  lines w0.127: -16.257,-99.267 -16.239,-99.267
  lines w0.15: 59.432,-26.729 61.249,-26.729 ; 59.44,-45.674 61.249,-45.674

## Silkscreen, mask and mechanical layers (free items; w line width, h text height)
Top Overlay:
  circle w0.2: c-18.21,-14.135 r1.5
  circle w0.2: c7.373,-85.234 r1
  circle w0.2: c56.22,-54.871 r1
  circle w0.2: c56.22,-51.31 r1
  circle w0.2: c14.16,-84.868 r1
  circle w0.1: c-15.387,-22.938 r3.683
  circle w0.1: c64.75,-17.858 r3.683
  circle w0.1: c64.75,-89.994 r3.683
  circle w0.1: c-24.785,-90.121 r3.683
  text "GND" at -16.526,-14.502 h1
  text "SEC" at 33.054,-17.594 h0.6 r90
  text "GND" at 40.69,-17.594 h0.6 r90
  text "SWIO" at 43.235,-18.094 h0.6 r90
  text "TEST" at 35.599,-18.194 h0.6 r90
  text "JTAG" at 38.144,-18.194 h0.6 r90
  text "SWCLK" at 45.78,-18.794 h0.6 r90
  text "5.7V" at 48.887,-19.016 h0.8 r90
  text "VAA" at 53.831,-28.422 h0.8
  text "RX" at -18.651,-31.574 h0.8
  text "IO" at 54.764,-31.656 h0.8
  text "TX" at -18.687,-34.111 h0.8
  text "KEY" at 53.831,-34.889 h0.8
  text "GND" at -19.418,-36.648 h0.8
  text "SX601702A-20200428" at 89.281,-37.532 h1.52 r90
  text "RST" at 53.831,-38.123 h0.8
  text "V485" at -20.273,-39.184 h0.8
  text "CLK" at 53.831,-41.357 h0.8
  text "485B" at -25.303,-41.861 h1.2
  text "GND" at 53.831,-44.591 h0.8
  text "485A" at -25.303,-45.537 h1.2
  text "5.7V" at 57.718,-51.448 h0.8
  text "QA" at -25.303,-52.549 h1.2
  text "GND" at 57.777,-55.162 h1
  text "QB" at -25.303,-56.6 h1.2
  text "S+" at -25.303,-65.281 h1.2
  text "S-" at -25.303,-68.392 h1.2
  text "P+" at -25.303,-77.692 h1.2
  text "P-" at -25.303,-80.644 h1.2
  text "L" at 13.95,-83.699 h0.8
  text "VEMU" at 5.74,-84.069 h0.8
  text "L" at 27.905,-94.905 h1.2
  text "N" at 51.929,-95.082 h1.2
  text "I-" at -14.205,-95.289 h1.2
  text "I+" at -10.393,-95.289 h1.2
  text "CT-" at -6.372,-95.289 h1.2
  text "CT+" at -2.169,-95.289 h1.2
  text "SX601701A-20200606" at 3.08,-98.242 h2.5
Bottom Overlay:
  circle w0.2: c-18.196,-14.121 r1.5
  text "GND" at 75.556,-23.513 h0.8 r90
  text "VCC" at 85.152,-27.692 h1.02 r180
  text "I/O" at 85.127,-30.887 h1.02 r180
  text "KEY" at 85.176,-34.155 h1.02 r180
  text "RST" at 85.201,-37.57 h1.02 r180
  text "CLK" at 85.152,-40.421 h1.02 r180
  text "IC-GND" at 85.225,-43.836 h1.02 r180
  text "VCC" at 111.639,-48.815 h1.02
  text "RST" at 111.652,-51.327 h1.02
  text "CLK" at 111.702,-53.901 h1.02
  text "KEY" at 114.163,-58.571 h1.02
  text "GND" at 110.579,-58.646 h1.02

## Text inside footprints (layer, text, board x,y; h text height)
BAT1: Bottom Overlay "+" at 25.357,-13.924 h0.7 r180
BT1: Bottom Overlay "10V 100mA" at 36.734,-71.206 h0.7
IRC: Top Overlay "GND" at 26.929,-62.184 h0.7 r90; Top Overlay "IN" at 26.905,-59.253 h0.7 r90; Top Overlay "OUT" at 26.96,-64.818 h0.7 r90
SPK: Bottom Overlay "+" at -14.101,-16.583 h0.7 r270
UP1: Bottom Overlay "+" at 55.922,-56.937 h0.7 r270; Bottom Overlay "-" at 55.922,-59.985 h0.7 r270; Bottom Overlay "~" at 48.81,-57.445 h0.7 r270; Bottom Overlay "~" at 48.81,-59.985 h0.7 r270